# EAGLE board blink1mk3_card2 (EAGLE 9.0.1)
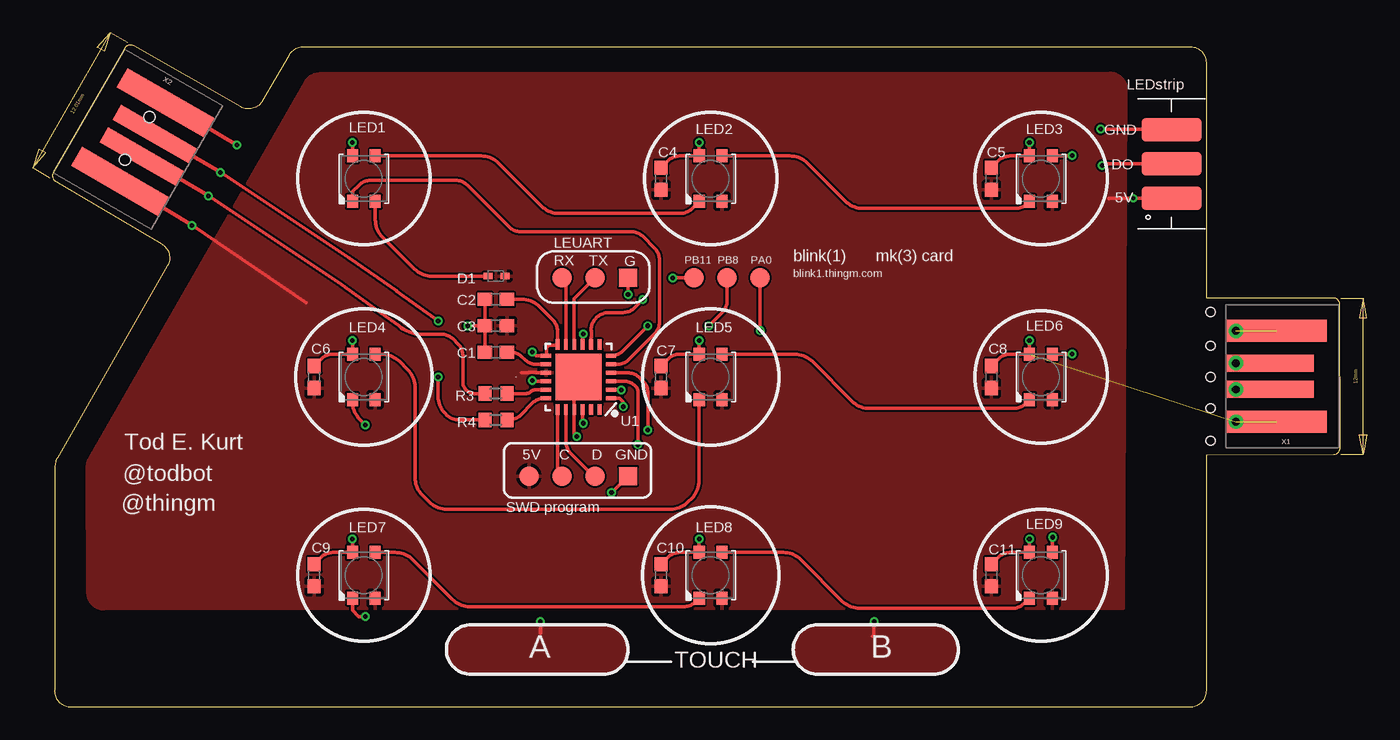
[diagram p0: board, top side]
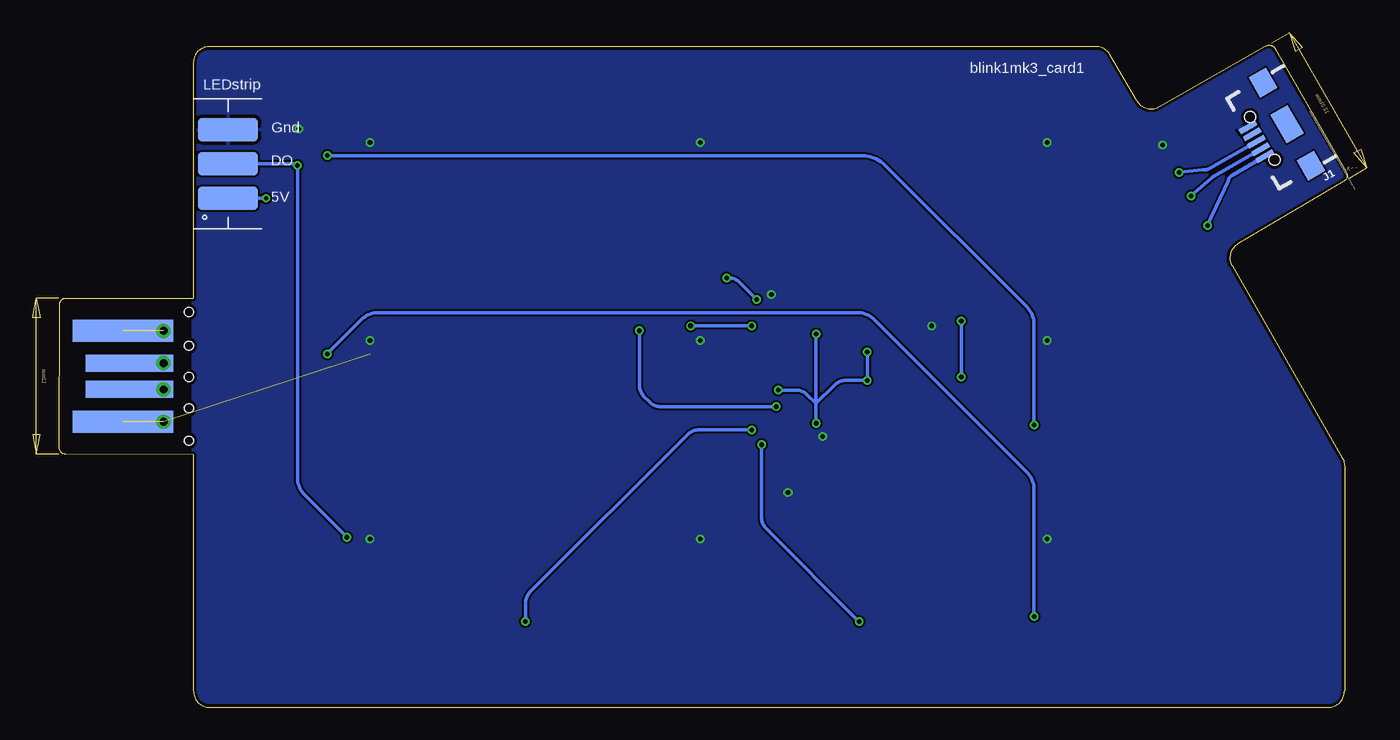
[diagram p1: board, bottom side, seen from below]

Size 99.01 x 50.92 mm. Coordinates in mm from the lower left corner, seen from the top.
Outline: 16.17,46.63 18.23,50.18 arc-60 19.31,50.8 87.44,50.8 arc-90 88.71,49.6 88.71,31.45 98.49,31.47 arc-90 98.99,30.97 99.01,19.95 arc-90 98.51,19.45 88.71,19.44 88.71,1.27 arc-90 87.44,0 1.46,0 arc-90 0.19,1.27 0.19,18.54 arc-30 0.36,19.16 8.84,33.93 arc89 8.4,35.63 0.25,40.44 arc-90 0.07,41.12 5.55,50.67 arc-90 6.24,50.85 14.47,46.17 arc89 16.17,46.63
Copper layers (1*16): Top 0.035mm / dielectric 1.5mm / Bottom 0.035mm
Design rules "SeeedStudio_2layer_DRU_no_angle_20140221": minimum track width 6mil, minimum drill 12mil, track to track 6mil, track to pad 6mil, pad to pad 6mil, via to via 6mil, smd to smd 0mil, copper to edge 10mil, drill to drill 10mil, minimum pad ring 10mil, minimum via ring 6mil, stop-mask expansion 2mil, vias tented up to drill 100mil, thermal gap 10mil
Holes 0.7 mm at 89.06,30.4 89.06,20.5 89.06,25.4 89.06,27.8 89.06,23

## Footprints (pad centres in the part's own frame; a part is rotated, then mirrored left to right if it is on the bottom)
TP15R = smd 1.5 x 1.5: TP 0,0
C0603 = smd 1.1 x 1: 1 -0.85,0; 2 0.85,0
SOD523 = smd 0.7 x 0.5: A 0.7,0; C -0.6,0
TP14SQ = smd 1.4 x 1.4: TP 0,0
USB-B-MICRO-SMD = smd 1.45 x 0.4: D+ 2.725,0; D- 2.725,0.65; GND 2.725,-1.3; ID 2.725,-0.65; VBUS 2.725,1.3 | smd 1.5 x 1.8: SHIELD1 0,3.685; SHIELD2 0,-3.685 | smd 1.5 x 2.5: SHIELD3 0,0 | hole 0.85: 2.2,1.9; 2.2,-1.9
LED3535 = smd 1 x 0.85: 1 -1.75,0.875; 2 -1.75,-0.875; 3 1.75,-0.875; 4 1.75,0.875
R0603 = smd 1 x 1.1: 1 -0.85,0; 2 0.85,0
QFN24PAD = smd 0.8 x 0.3: 1 -2.5,1.625; 2 -2.5,0.975; 3 -2.5,0.325; 4 -2.5,-0.325; 5 -2.5,-0.975; 6 -2.5,-1.625; 13 2.5,-1.625; 14 2.5,-0.975; 15 2.5,-0.325; 16 2.5,0.325; 17 2.5,0.975; 18 2.5,1.625 | smd 0.3 x 0.8: 7 -1.625,-2.5; 8 -0.975,-2.5; 9 -0.325,-2.5; 10 0.325,-2.5; 11 0.975,-2.5; 12 1.625,-2.5; 19 1.625,2.5; 20 0.975,2.5; 21 0.325,2.5; 22 -0.325,2.5; 23 -0.975,2.5; 24 -1.625,2.5 | smd 3.55 x 3.55: PAD 0,0
LEDSTRIP-3P = smd 4.6 x 1.8: A 0,-2.65; B 0,0; C 0,2.63
USB-A-PCB-TWOSIDED = smd 7.75 x 1.69: 5V@1 2.34,-3.5; GND@1 2.34,3.5 | smd 7.75 x 1.69 bottom: 5V@2 2.34,-3.5; GND@2 2.34,3.5 | drill 0.6: 5V@3 5.461,-3.493; GND@3 5.461,3.493; USB_M@3 5.461,-1.016; USB_P@3 5.461,1.016 | smd 6.75 x 1.3: USB_M@1 2.84,-1; USB_P@1 2.84,1 | smd 6.75 x 1.3 bottom: USB_M@2 2.84,-1; USB_P@2 2.84,1
USB-A-PCB-2 = smd 7.75 x 1.69: 5V -1.47,-3.5; GND -1.47,3.5 | smd 6.75 x 1.3: USB_M -0.97,-1; USB_P -0.97,1

## Placement (x,y rotation side)
5V  TPTP15R  [TP15R]  36.64,17.78 0 top
C  TPTP15R  [TP15R]  39.18,17.78 0 top
C1  1uF  [C0603]  34.1,27.3 180 top
C2  1uF  [C0603]  34.1,31.37 180 top
C3  4.7uF  [C0603]  34.1,29.34 180 top
C4  0.1uF  [C0603]  46.8,40.64 90 top
C5  0.1uF  [C0603]  72.2,40.64 90 top
C6  0.1uF  [C0603]  20.13,25.4 90 top
C7  0.1uF  [C0603]  46.8,25.4 90 top
C8  0.1uF  [C0603]  72.2,25.4 90 top
C9  0.1uF  [C0603]  20.13,10.16 90 top
C10  0.1uF  [C0603]  46.8,10.16 90 top
C11  0.1uF  [C0603]  72.2,10.16 90 top
D  TPTP15R  [TP15R]  41.72,17.78 0 top
D1  1N1418  [SOD523]  34.1,33.15 0 top
G  TPTP14SQ  [TP14SQ]  44.26,33.02 0 top
GND  TPTP14SQ  [TP14SQ]  44.26,17.78 0 top
J1  NONPOP  [USB-B-MICRO-SMD]  4.61,44.84 210 bottom
LED1  SK6812MINI  [LED3535]  23.94,40.64 90 top
LED2  SK6812MINI  [LED3535]  50.61,40.64 90 top
LED3  SK6812MINI  [LED3535]  76.01,40.64 90 top
LED4  SK6812MINI  [LED3535]  23.94,25.4 90 top
LED5  SK6812MINI  [LED3535]  50.61,25.4 90 top
LED6  SK6812MINI  [LED3535]  76.01,25.4 90 top
LED7  SK6812MINI  [LED3535]  23.94,10.16 90 top
LED8  SK6812MINI  [LED3535]  50.61,10.16 90 top
LED9  SK6812MINI  [LED3535]  76.01,10.16 90 top
PA0  TPTP15R  [TP15R]  54.42,33.02 0 top
PB8  TPTP15R  [TP15R]  51.88,33.02 0 top
PB11  TPTP15R  [TP15R]  49.34,33.02 0 top
R3  15  [R0603]  34.1,24.13 180 top
R4  15  [R0603]  34.1,22.1 180 top
RX  TPTP15R  [TP15R]  39.18,33.02 0 top
TX  TPTP15R  [TP15R]  41.72,33.02 180 top
U1  EFM32HG309F64G  [QFN24PAD]  40.45,25.4 180 top
U$1  LED_STRIP_3P  [LEDSTRIP-3P]  86.05,41.78 0 top
U$2  LED_STRIP_3P  [LEDSTRIP-3P]  86.05,41.78 0 bottom
X1  USBPCB2SIDE  [USB-A-PCB-TWOSIDED]  96.46,25.45 180 top
X2  USBPCB2  [USB-A-PCB-2]  8.23,42.71 330 top

## Library data of the parts
5V C D G GND PA0 PB8 PB11 RX TX = testpad
C1-C11 LED1-LED9 R3 R4 = adafruit
D1 = diode
J1 = SparkFun-Connectors; PROD_ID: CONN-11752
U1 X1 X2 = todstuff
U$1 U$2 = NeoJoints

## Nets
+3V3: C2.1 U1.2 U1.9 U1.12 U1.13 U1.16 U1.22
+5V: 5V.TP C3.1 C4.1 C5.1 C6.1 C7.1 C8.1 C9.1 C10.1 C11.1 D1.A J1.VBUS LED2.2 LED3.2 LED4.2 LED5.2 LED6.2 LED7.2 LED8.2 LED9.2 U1.15 U$1.A U$2.A X2.5V
/RESET: U1.7
CAP0A: U1.3
CAP0B: U1.23
CAP1A: U1.4
CAP1B: U1.24
DBG_SWCLK: C.TP U1.19
DBG_SWDIO: D.TP U1.20
DECOUPLE: C1.1 U1.14
DI: LED1.1 U1.5
DO: LED9.3 U$1.B U$2.B
GND: C1.2 C2.2 C3.2 C4.2 C5.2 C6.2 C7.2 C8.2 C9.2 C10.2 C11.2 G.TP GND.TP J1.GND LED1.4 LED2.4 LED3.4 LED4.4 LED5.4 LED6.4 LED7.4 LED8.4 LED9.4 U1.21 U1.PAD U$1.C U$2.C X1.GND@1 X1.GND@2 X1.GND@3 X2.GND
LEUO_RX: RX.TP U1.11
LEUO_TX: TX.TP U1.10
N$2: LED1.3 LED2.1
N$4: LED7.3 LED8.1
N$5: LED4.3 LED5.1
N$6: LED5.3 LED6.1
N$7: LED2.3 LED3.1
N$8: LED3.3 LED4.1
N$9: LED8.3 LED9.1
N$10: LED6.3 LED7.1
PA0: PA0.TP U1.1
PB8: PB8.TP U1.6
PB11: PB11.TP U1.8
RUSB_D+: R4.1 U1.18
RUSB_D-: R3.1 U1.17
USB_D+: J1.D+ R4.2 X2.USB_P
USB_D-: J1.D- R3.2 X2.USB_M
VBUS: X1.5V@1 X1.5V@2 X1.5V@3
VLEDA: D1.C LED1.2

## Tracks (layer width: path | path; a pad name or v marks a point on that pad's centre or on a via)
+3V3  (via drill 0.35)
  Top 0.254: C2.1 36.11,31.37 arc-45 37.45,30.81 38.46,29.81 arc-45 38.83,28.91 U1.12 38.78,27.85 38.2,27.85 38,27.65 38,27.07 U1.13 37.18,27.02 v36.9,27.3 37.05,27.15 | U1.9 40.78,28.65 v40.83,28.7 | U1.2 43.71,24.42 v43.75,24.38 | U1.22 40.78,21.9 v40.83,21.84 | U1.16 36.97,25.07 v36.9,25.15
  Bottom 0.254: v43.75,24.38 42.38,24.38 arc45 41.48,24.01 40.83,23.37 | 40.83,23.37 v40.83,21.84 | 40.83,23.37 39.43,24.77 arc45 38.53,25.15 v36.9,25.15 v36.9,27.3 | v40.83,28.7 40.83,23.37
+5V  (via drill 0.33, 0.35)
  Top 0.254: 81.22,39.12 81.24,39.13 v83.12,39.13 U$2.A | 19.5,31.11 v10.73,37.05 X2.5V | U1.15 37.18,25.72 37.15,25.75 36.65,25.75 36.62,25.72 36.06,25.72
  Bottom 0.254: J1.VBUS 8.84,40.9 arc-47 9.15,40.5 v10.73,37.05 | v83.12,39.13 U$2.A
  pour Top: 82.33,7.62 82.56,47.48 arc90 81.3,48.74 20.54,48.69 arc60 19.45,48.06 2.85,19.1 arc30 2.69,18.47 2.73,8.81 arc90 3.98,7.57
CAP0A  (via drill 0.35)
  Top 0.254: v37.53,6.6 37.53,5.71 | U1.3 43.93,25.07 arc-45 44.83,24.7 arc-45 45.02,24.24 v45.02,20.19
  Bottom 0.254: v45.02,20.19 45.02,14.62 arc-45 44.65,13.72 v37.53,6.6
  pour Top: 32.2,6.35 42.36,6.35 arc-90 44.26,4.45 arc-90 42.36,2.54 32.2,2.54 arc-90 30.29,4.45 arc-90
CAP1A  (via drill 0.35)
  Top 0.254: v45.79,21.34 45.79,24.18 arc45 45.41,25.07 45.14,25.35 arc45 44.24,25.72 U1.4 | v63.19,6.6 63.19,5.59 63.06,5.46
  Bottom 0.254: v45.79,21.34 49.83,21.34 arc-45 50.73,20.96 62.81,8.88 arc-45 63.19,7.98 v63.19,6.6
  pour Top: 58.87,6.35 67.76,6.35 arc-90 69.66,4.45 arc-90 67.76,2.54 58.87,2.54 arc-90 56.96,4.45 arc-90
DBG_SWCLK
  Top 0.254: U1.19 38.83,18.13 C.TP
DBG_SWDIO
  Top 0.254: D.TP 41.6,17.78 40.07,19.3 39.96,19.41 39.85,19.53 arc-45 39.48,20.42 U1.20
DECOUPLE
  Top 0.254: C1.1 35.23,27.3 arc-45 36.13,26.93 36.31,26.75 arc45 37.21,26.38 U1.14
DI
  Top 0.254: LED1.1 23.07,39.61 23.05,39.62 23.57,40.14 arc-45 24.47,40.51 31.01,40.51 arc-45 31.91,40.14 35.1,36.95 arc45 36,36.58 44.5,36.58 arc-45 45.4,36.2 46.3,35.3 arc-45 46.68,34.4 46.68,29.61 arc-45 46.3,28.71 44.34,26.75 arc-45 43.44,26.38 U1.5
DO  (via drill 0.35)
  Top 0.254: v76.9,13.08 76.89,13.07 LED9.3 | U$2.B 80.84,41.78 arc90 v80.71,41.66
  Bottom 0.254: v76.9,13.08 80.15,16.33 arc45 80.71,17.68 v80.71,41.66 arc-45 81.02,41.78 U$2.B
GND  (via drill 0.35)  (3 unrouted)
  Top 0.254: LED1.4 23.07,43.42 v23.05,43.43 | U$2.C arc90 86.01,44.45 v80.58,44.45 | X2.GND v14.2,43.22 | C1.2 C3.2 | C3.2 C2.2 | C3.2 v31.94,29.34 | GND.TP v42.99,16.51 | G.TP v44.26,31.75 | C10.2 47.33,11.54 arc-45 48.23,11.91 LED8.4 49.74,12.94 v49.72,12.95 | C11.2 72.73,11.54 arc-45 73.63,11.91 LED9.4 75.14,12.94 v75.12,12.95 | C8.2 72.73,26.78 arc-45 73.63,27.15 LED6.4 75.14,28.18 v75.12,28.19 | C5.2 72.73,42.02 arc-45 73.63,42.39 LED3.4 75.14,43.42 v75.12,43.43 | C9.2 20.66,11.54 arc-45 21.56,11.91 LED7.4 23.07,12.94 v23.05,12.95 | C6.2 20.66,26.78 arc-45 21.56,27.15 LED4.4 23.07,28.18 v23.05,28.19 | C4.2 47.33,42.02 arc-45 48.23,42.39 LED2.4 49.74,43.42 v49.72,43.43 | C7.2 47.33,26.78 arc-45 48.23,27.15 LED5.4 49.74,28.18 v49.72,28.19 | U1.PAD 40.1,25.05 U1.21 40.13,21.03 v40.33,20.83
  pour Bottom: 88.71,50.8 -0.19,50.8 -0.19,0 88.71,0
LEUO_RX
  Top 0.254: 39.4,32.8 RX.TP 39.48,32.73 U1.11
LEUO_TX
  Top 0.254: TX.TP 40.58,31.88 40.47,31.77 40.13,31.42 U1.10
N$2
  Top 0.254: LED1.3 32.96,42.39 arc-45 34.31,41.83 37.61,38.53 arc45 38.96,37.97 48.29,37.97 arc45 49.19,38.34 LED2.1
N$4
  Top 0.254: LED7.3 26.36,11.91 arc-45 27.7,11.35 30.75,8.3 arc45 32.1,7.75 48.55,7.75 arc45 49.45,8.12 LED8.1
N$5
  Top 0.254: LED4.3 25.34,27.15 arc-45 26.69,26.59 27.32,25.96 arc-45 27.88,24.61 27.88,17.68 arc45 28.44,16.33 28.97,15.8 arc45 30.32,15.24 47.54,15.24 arc45 48.88,15.8 49.17,16.08 arc45 49.72,17.43 49.72,23.64 LED5.1
N$6
  Top 0.254: LED5.3 57.09,27.15 arc-45 58.44,26.59 61.48,23.54 arc45 62.83,22.99 73.95,22.99 arc45 74.85,23.36 LED6.1
N$7
  Top 0.254: LED2.3 56.71,42.39 arc-45 58.06,41.83 60.98,38.91 arc45 62.32,38.35 74.08,38.35 arc45 74.97,38.73 LED3.1
N$8  (via drill 0.35)
  Top 0.254: 76.99,42.29 LED3.3 78.43,42.39 v78.43,42.42 | v24.07,21.72 23.63,22.16 arc-45 23.07,23.51 LED4.1
  Bottom 0.254: v78.43,42.42 75,42.42 49.72,42.42 37.31,42.42 arc45 35.52,41.67 24.63,30.78 arc45 24.07,29.44 v24.07,21.72
N$9
  Top 0.254: LED8.3 56.2,11.91 arc-45 57.55,11.35 60.72,8.18 arc45 62.07,7.62 73.82,7.62 arc45 74.72,7.99 LED9.1
N$10  (via drill 0.35)
  Top 0.254: LED6.3 78.4,27.15 v78.43,27.18 | v24.07,6.98 23.56,6.98 23.07,7.48 LED7.1
  Bottom 0.254: v24.07,6.98 24.07,16.74 arc-45 24.63,18.08 36.34,29.79 arc-45 37.69,30.35 74.46,30.35 arc-45 75.81,29.79 v78.43,27.18
PA0  (via drill 0.35)
  Top 0.254: v54.42,28.96 PA0.TP | U1.1 43.6,23.77 43.88,23.49 v43.88,23.11
  Bottom 0.254: v43.88,23.11 52.75,23.11 arc45 53.65,23.49 54.05,23.88 arc45 54.42,24.78 v54.42,28.96
PB8  (via drill 0.35)
  Top 0.254: v50.49,29.34 51.51,30.36 arc45 51.88,31.26 PB8.TP | v45.79,29.34 43.84,27.39 arc-45 U1.6
  Bottom 0.254: v45.79,29.34 v50.49,29.34
PB11  (via drill 0.35)
  Top 0.254: PB11.TP v47.69,33.02 | v45.41,31.37 44.76,30.72 arc-45 43.86,30.35 42.76,30.35 arc45 41.86,29.98 41.8,29.92 arc45 41.43,29.02 41.43,28.97 41.44,28.95 41.44,28.45 41.43,28.44 U1.8
  Bottom 0.254: v47.69,33.02 47.58,33.02 arc45 46.68,32.65 v45.41,31.37
RUSB_D+
  Top 0.254: U1.18 37.83,23.77 arc45 36.93,23.4 36,22.47 arc-45 35.1,22.1 R4.1
RUSB_D-
  Top 0.254: 35.25,24.42 R3.1 36.46,24.13 arc45 36.77,24.26 arc-45 37.18,24.42 U1.17
USB_D+  (via drill 0.35)
  Top 0.254: v29.66,25.4 29.66,23.9 arc45 30.22,22.56 arc45 31.32,22.1 R4.2 | X2.USB_P v12.93,41.12 22.85,34.54 26.46,32.03 26.48,32 v29.66,29.72
  Bottom 0.254: J1.D+ 10.64,41.4 arc44 11.11,41.34 v12.93,41.12 | v29.66,29.72 v29.66,25.4
USB_D-  (via drill 0.35)
  Top 0.254: X2.USB_M v12,39.31 22.2,32.52 25.24,30.35 26.64,29.33 arc45 28.56,28.7 29.89,28.7 arc-45 30.79,28.33 31.19,27.93 arc-45 31.56,27.03 31.56,25 arc45 31.82,24.38 arc45 32.43,24.13 R3.2
  Bottom 0.254: J1.D- 10.25,40.83 arc-22 10.43,40.67 v12,39.31
VBUS  (2 unrouted)
VLEDA
  Top 0.254: D1.C 29.18,33.15 arc-45 27.83,33.7 25.39,36.14 arc-45 24.83,37.49 24.83,38.88 LED1.2

## Text on the board
tPlace: LEDstrip | GND | DO | 5V | LEUART | blink(1) | mk(3) card | blink1.thingm.com | Tod E. Kurt | @todbot | @thingm | SWD program | A | TOUCH | B
bPlace: blink1mk3_card1 | LEDstrip | Gnd | DO | 5V